# Altium PCB STM32F103C8T6 Blue Pill.PcbDoc
Units mm, origin at the board's own origin, x right, y up, seen from the top; angles counter-clockwise.
Board outline 53.85 x 25.78 mm, 4 copper layers (Top Layer, Layer 1, Layer 2, Bottom Layer), stack 0.55 mm thick; 36 components, 51 nets, 209 pads, 2 vias.
Unrouted connection lines stored in the file: 1.
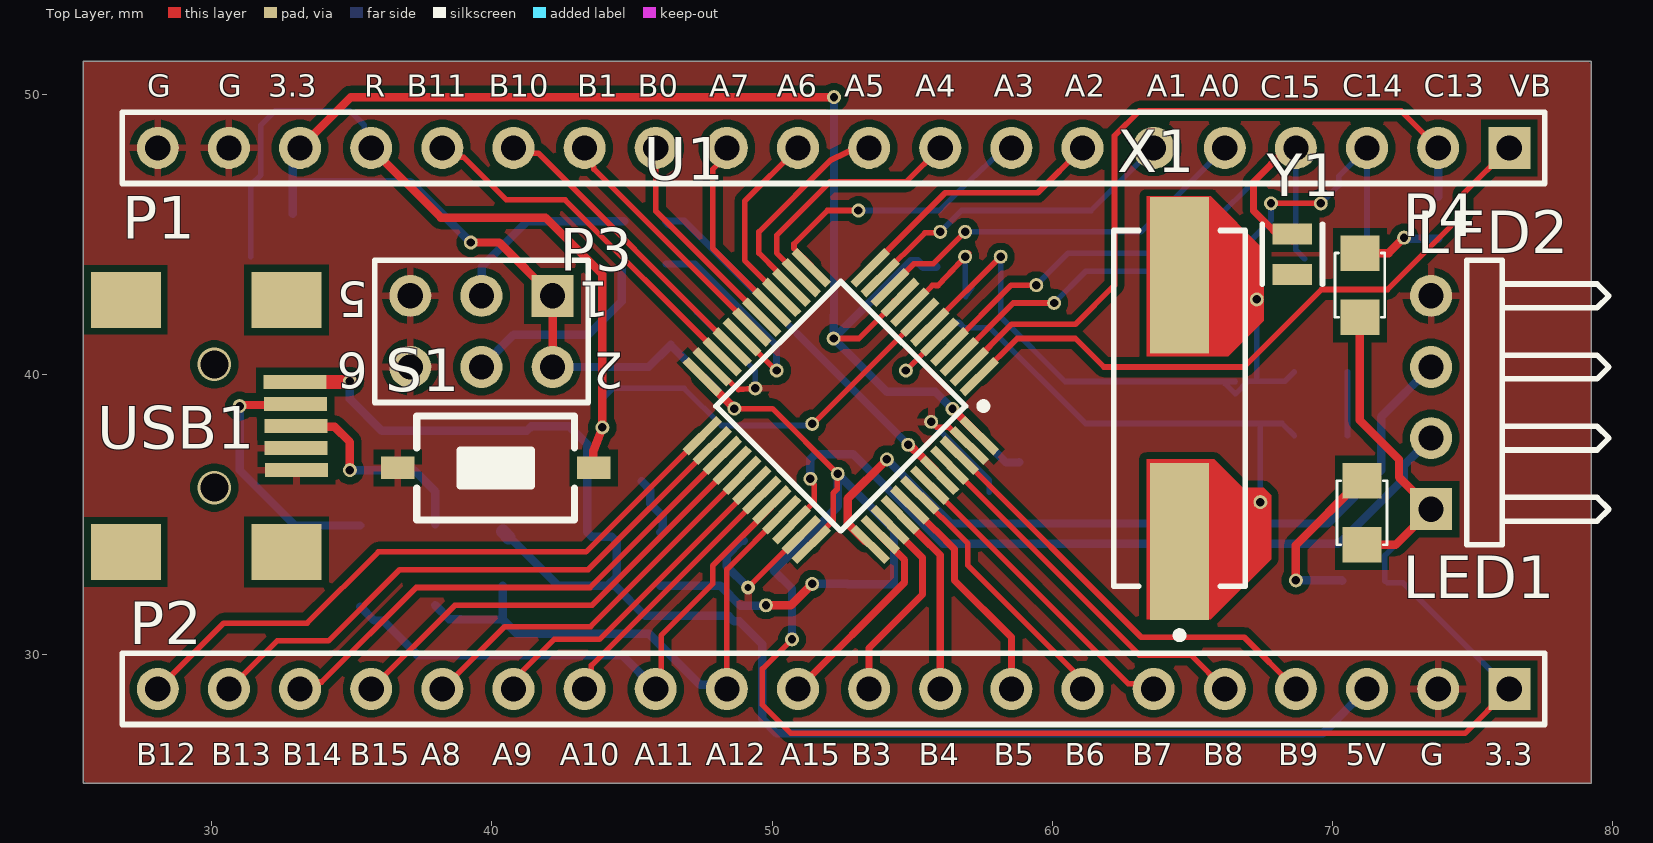
[diagram p0: Top Layer view]
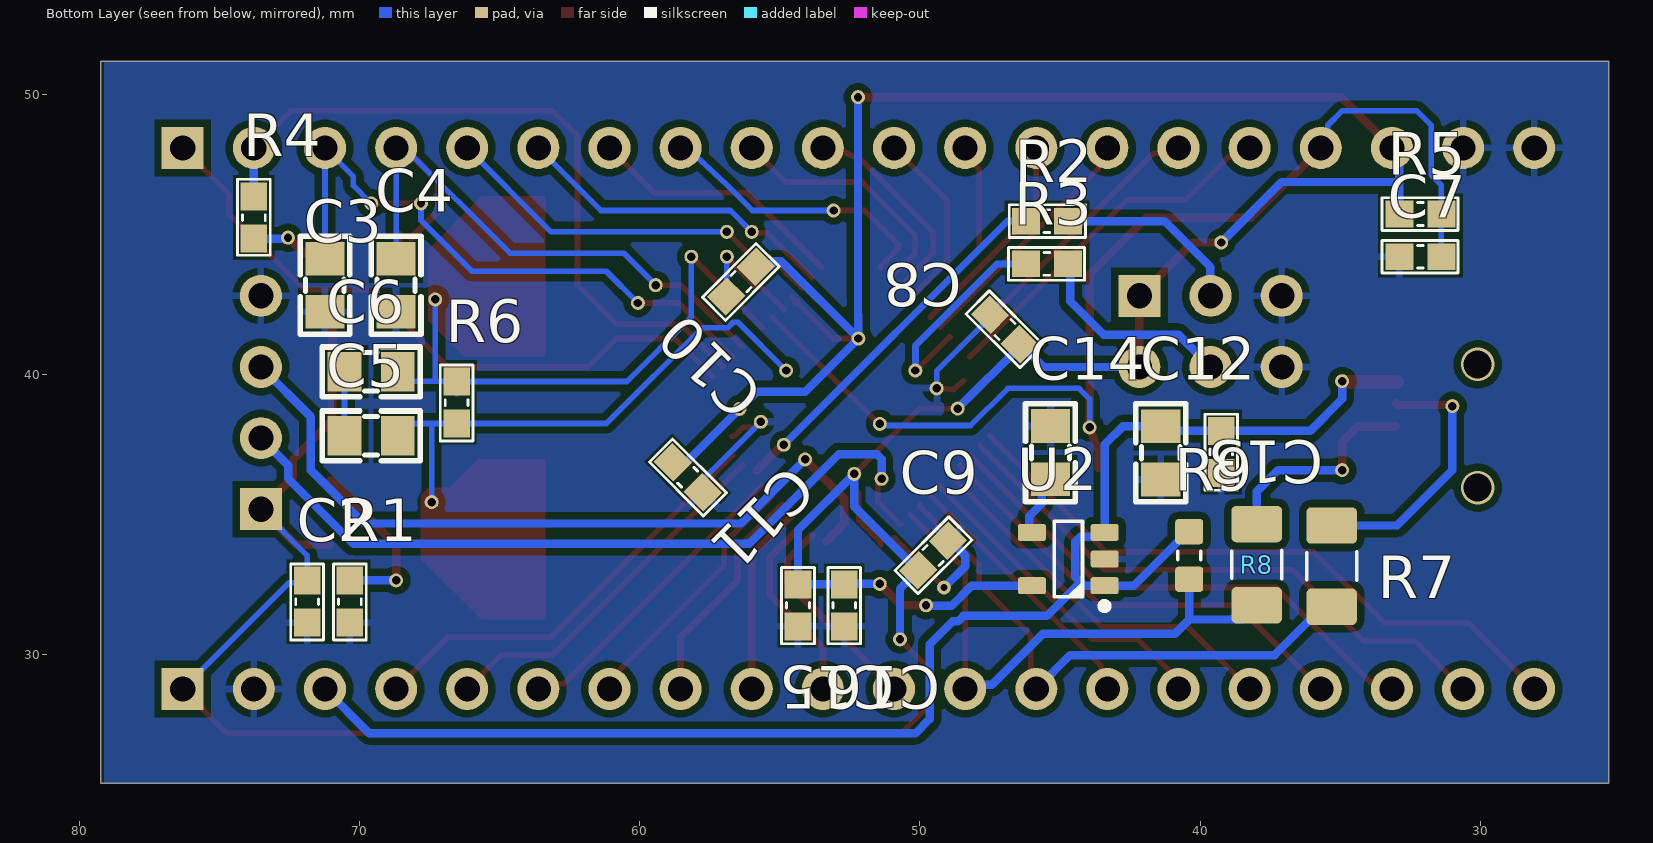
[diagram p1: Bottom Layer view, seen from below]
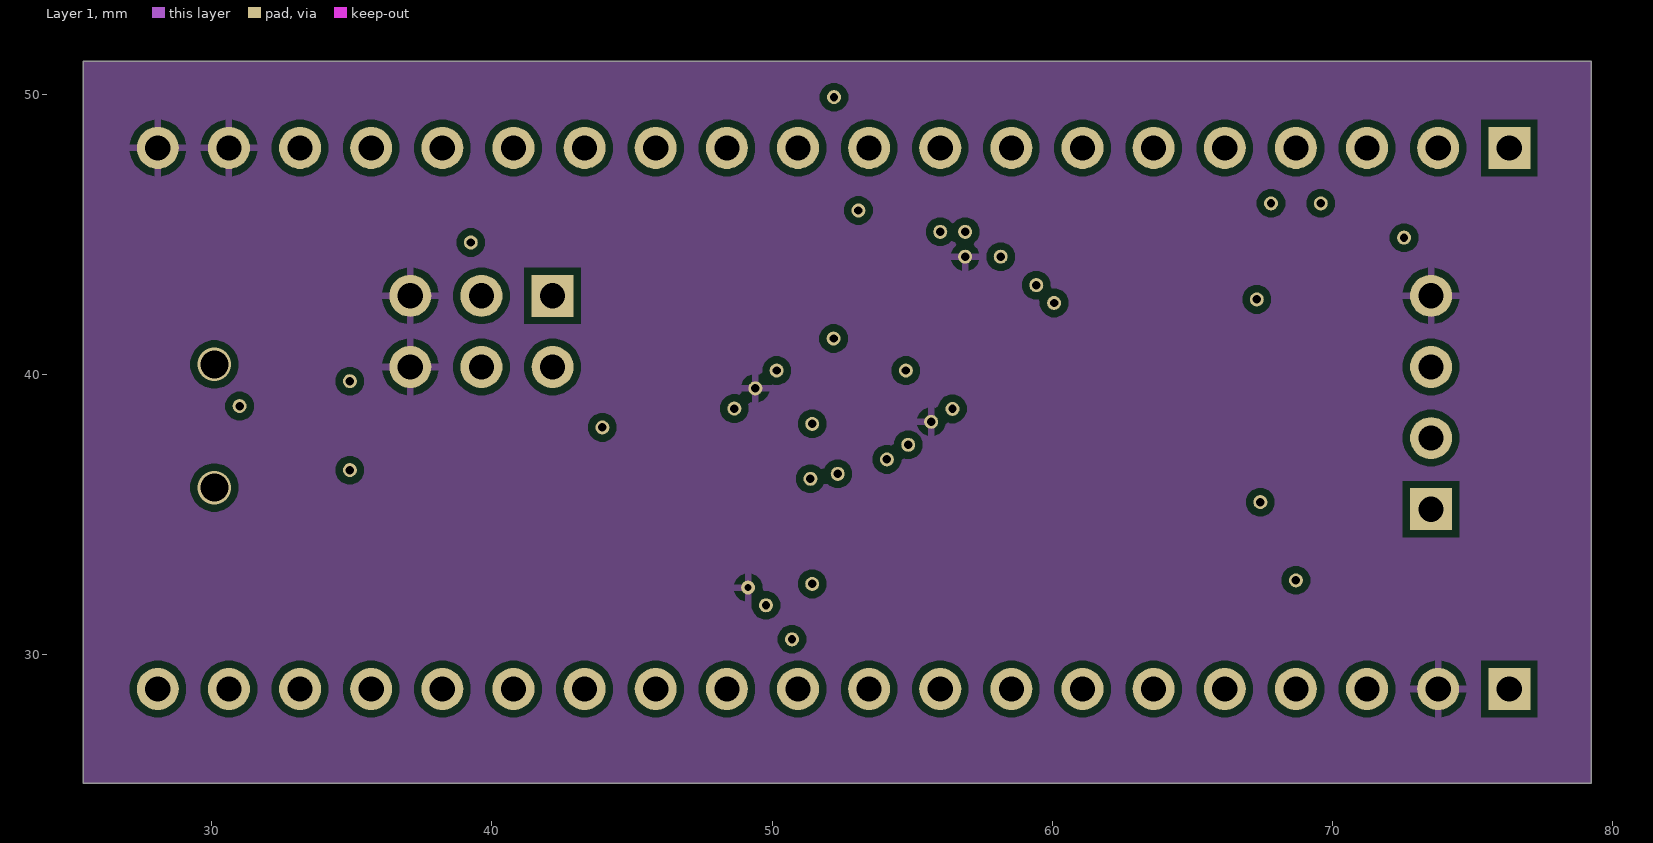
[diagram p2: Layer 1]
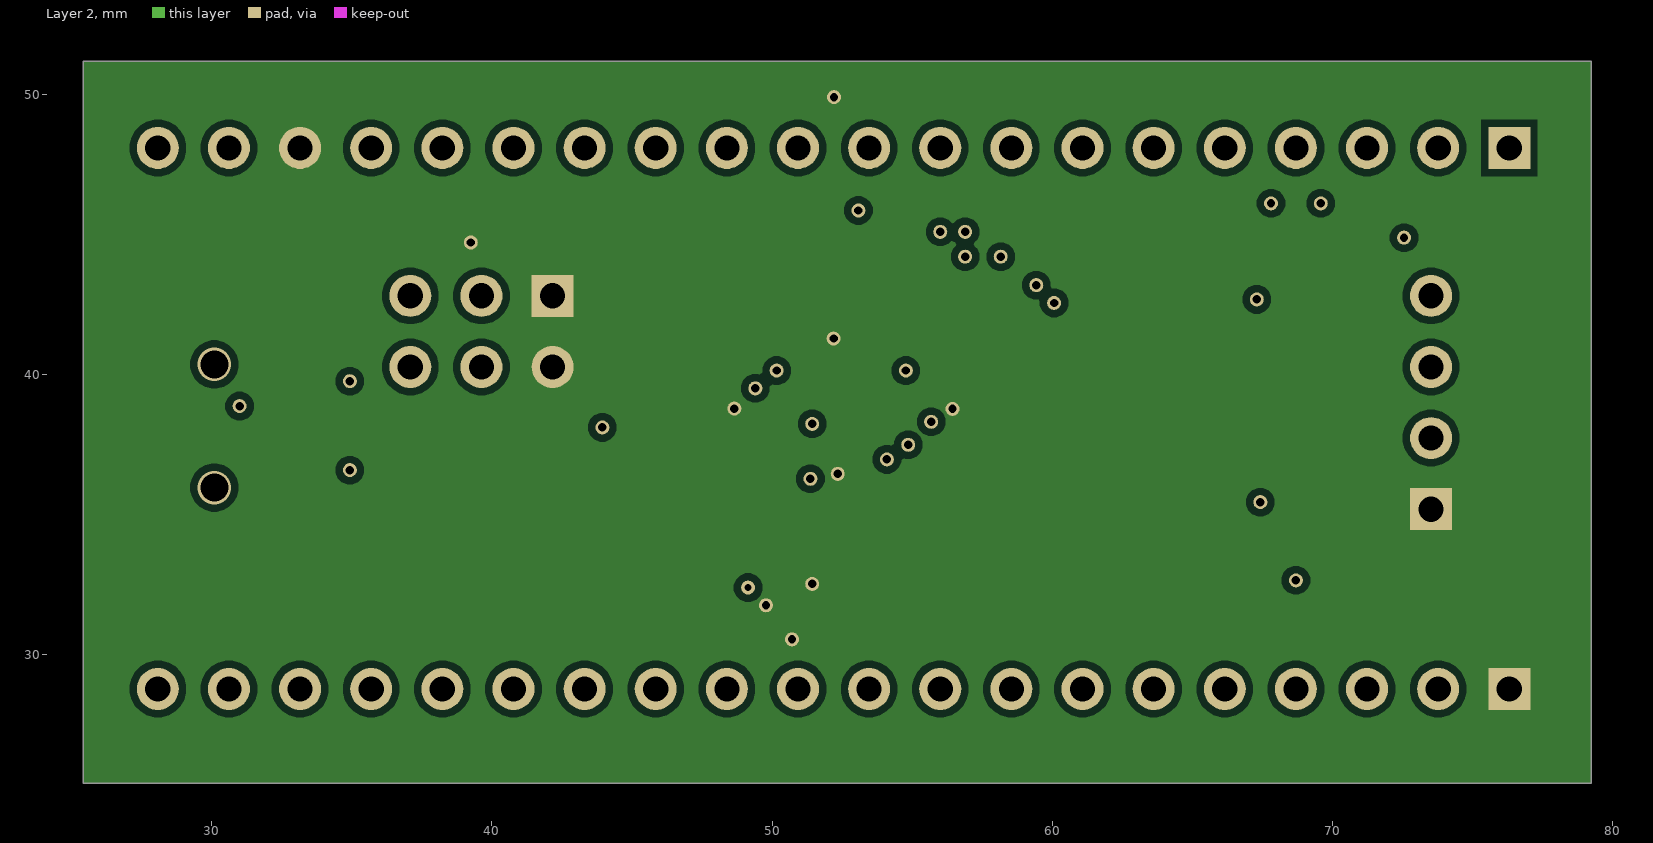
[diagram p3: Layer 2]

## Layer stack, top to bottom
Top Solder: solder mask 0.0102, Solder Resist, Dk 3.5
Top Layer: signal copper 0.009
Dielectric 2: prepreg 0.0711, PP-006, Dk 4.1
Layer 1: signal copper 0.035
Dielectric 1: dielectric 0.32, FR-4, Dk 4.8
Layer 2: signal copper 0.035
Dielectric 3: prepreg 0.0711, PP-006, Dk 4.1
Bottom Layer: signal copper 0.009
Bottom Solder: solder mask 0.0102, Solder Resist, Dk 3.5

## Board outline
25.4,25.4 79.248,25.4 79.248,51.181 25.4,51.181

## Design rules (kind name [scope] priority, off if disabled: settings)
Clearance [InComponent('U1')] p1: gap=0.15 ignorepadtopadclearanceinfootprint=FALSE
Clearance Clearance_1 [All] p2: gap=0.254 ignorepadtopadclearanceinfootprint=FALSE
PlaneConnect [All] p1: planeconnectstyle=Direct reliefexpansion=0.508 reliefentries=4 reliefconductorwidth=0.254 reliefairgap=0.254
PolygonConnect [All] p1: connectstyle=Direct reliefconductorwidth=0.254 reliefentries=4 polygonreliefangle="90 Angle" airgapwidth=0.254
RoutingVias [All] p1: holewidth=0.711 width=1.27 viastyle="Through Hole" minholewidth=0.711 minwidth=1.27 maxholewidth=0.711 maxwidth=1.27
SolderMaskExpansion [All] p1: expansion=0.102 istentingtop=FALSE
Width Width_1 [All] p1: maxlimit=0.5 minlimit=0.2 preferedwidth=0.3
29 further rules are at their usual default settings.

## Components (designator, comment, footprint, x,y, rotation, side; value= is the part's Value field where it differs from the comment)
C2 "104" "tu 0603" 71.882,31.877 r270 bottom
C3 "20pF" "tu 0805" 71.247,43.18 r270 bottom
C4 "20pF" "tu 0805" 68.707,43.18 r270 bottom
C5 "20pF" "tu 0805" 69.596,37.798 r0 bottom
C6 "20pF" "tu 0805" 69.596,40.084 r0 bottom
C7 "105" "tu 0603" 32.131,44.196 r0 bottom
C8 "104" "tu 0603" 46.968,41.598 r45 bottom
C9 "104" "tu 0603" 49.53,33.528 r135 bottom
C10 "104" "tu 0603" 56.388,43.307 r315 bottom
C11 "104" "tu 0603" 58.293,36.322 r225 bottom
C12 "105" "tu 0805" 41.402,37.197 r270 bottom
C13 "104" "tu 0603" 39.243,37.227 r270 bottom
C14 "22nF" "tu 0805" 45.342,37.197 r90 bottom
C15 "106" "tu 0603" 54.356,31.75 r270 bottom
C16 "104" "tu 0603" 52.705,31.75 r270 bottom
LED1 "LED SMD" SM-LED-0805-Blue 71.069,33.909 r90 top
LED2 "LED SMD" SM-LED-0805-Blue 70.993,42.037 r90 top
P1 "Header 20" HDR1X20 76.327,48.081 r180 top
P2 "Header 20" HDR1X20 76.327,28.761 r180 top
P3 "Header 3X2" HDR2X3 42.164,42.799 r180 top
P4 "Header 4H" HDR1X4H 73.533,35.179 r90 top
R1 "510R" "tro smd 0603" 70.358,31.877 r270 bottom
R2 "100k" "tro smd 0603" 45.466,45.466 r180 bottom
R3 "100k" "tro smd 0603" 45.466,43.942 r0 bottom
R4 "510R" "tro smd 0603" 73.787,45.593 r90 bottom
R5 "10k" "tro smd 0603" 32.131,45.72 r0 bottom
R6 "1M" "tro smd 0603" 66.548,38.989 r270 bottom
R7 "Thick Film" RESC3216N 35.299,33.147 r90 bottom value=20R
R8 "Thick Film" RESC3216N 37.973,33.2 r90 bottom locked value=20R
R9 "Thick Film" RESC1608N 40.386,33.528 r90 bottom value=4K7
S1 "SW-SMD" SW-SMD 40.132,36.654 r0 top
U1 "STM32F103C8T6" LQFP-48_19.6_393_58X11_SMD 52.455,38.862 r225 top
U2 "RT9193-33GB" SOT23-5 44.704,33.401 r0 bottom
USB1 "USB_M" USB_B_MINI_SMD 32.969,39.726 r90 top
X1 "8MHZ" ABRA-ABLS-14.7456MHZ-B2-T_V 64.549,38.782 r90 top
Y1 "ABS06-32.768KHZ-6-T" FP-ABS06-MFG 68.58,44.286 r90 top

## Footprints (in the part's own frame and the unit in brackets; to place one, negate y for a bottom-side part, rotate by r counter-clockwise, add the part's x,y. Pads: shape width x height; smd on the part's side, far side on the other; paste and mask are expansions set on the pad)
ABRA-ABLS-14.7456MHZ-B2-T_V [mm] "SMD, 2-Leads, Body 11.4x4.7mm"
  rect 5.6x2.1 smd: 1(-4.75,0) 2(4.75,0)
  silkscreen extent -8.22,-2.35 6.35,2.35, body extent -6.35,-2.35 6.35,2.35, height 4.16
FP-ABS06-MFG [mm]
  rect 0.75x1.4 smd paste+0 mask+0: 1(-0.725,0) 2(0.725,0)
  silkscreen extent -1.07,-1.07 1.07,1.07, body extent -1.2,-0.8 1.2,0.8, height 0.25
HDR1X4H [mm] "Connector; Header; 4 Position; Right Angle"
  rect 1.5x1.5 hole 0.9: 1(0,0)
  round 1.5 hole 0.9: 2(2.54,0) 3(5.08,0) 4(7.62,0)
  silkscreen extent -1.27,-6.35 8.89,-1.27, body extent -1.27,-7 8.89,1.27, height 4.33
HDR1X20 [mm] "Connector; Header; 20 Position"
  rect 1.5x1.5 hole 0.9: 1(0,0)
  round 1.5 hole 0.9: 2(2.54,0) 3(5.08,0) 4(7.62,0) 5(10.16,0) 6(12.7,0) 7(15.24,0) 8(17.78,0) 9(20.32,0) 10(22.86,0) 11(25.4,0) 12(27.94,0) 13(30.48,0) 14(33.02,0) 15(35.56,0) 16(38.1,0) 17(40.64,0) 18(43.18,0) 19(45.72,0) 20(48.26,0)
  silkscreen extent -1.27,-1.27 49.53,1.27
HDR2X3 [mm] "Connector; Header; 3x2 Position"
  rect 1.5x1.5 hole 0.9: 1(0,0)
  round 1.5 hole 0.9: 2(0,2.54) 3(2.54,0) 4(2.54,2.54) 5(5.08,0) 6(5.08,2.54)
  silkscreen extent -1.27,-1.27 6.35,3.81, body extent -1.27,-1.27 6.35,3.81, height 7
LQFP-48_19.6_393_58X11_SMD [mm] "48LQFP"
  rect 1.7x0.3 smd mask+0.076: 1(-4.238,2.75) 2(-4.238,2.25) 3(-4.238,1.75) 4(-4.238,1.25) 5(-4.238,0.75) 6(-4.238,0.25) 7(-4.238,-0.25) 8(-4.238,-0.75) 9(-4.238,-1.25) 10(-4.238,-1.75) 11(-4.238,-2.25) 12(-4.238,-2.75) 25(4.238,-2.75) 26(4.238,-2.25) 27(4.238,-1.75) 28(4.238,-1.25) 29(4.238,-0.75) 30(4.238,-0.25) 31(4.238,0.25) 32(4.238,0.75) 33(4.238,1.25) 34(4.238,1.75) 35(4.238,2.25) 36(4.238,2.75)
  rect 0.3x1.7 smd mask+0.076: 13(-2.75,-4.238) 14(-2.25,-4.238) 15(-1.75,-4.238) 16(-1.25,-4.238) 17(-0.75,-4.238) 18(-0.25,-4.238) 19(0.25,-4.238) 20(0.75,-4.238) 21(1.25,-4.238) 22(1.75,-4.238) 23(2.25,-4.238) 24(2.75,-4.238) 37(2.75,4.238) 38(2.25,4.238) 39(1.75,4.238) 40(1.25,4.238) 41(0.75,4.238) 42(0.25,4.238) 43(-0.25,4.238) 44(-0.75,4.238) 45(-1.25,4.238) 46(-1.75,4.238) 47(-2.25,4.238) 48(-2.75,4.238)
  silkscreen extent -3.72,-3.15 3.15,3.72, body extent -4.5,-4.5 4.5,4.5, height 1.7
RESC1608N [mm] "Chip Resistor, Body 1.6x0.8mm, 0603, IPC Medium Density"
  round 0.254 on Mech14: 0(0,0)
  rrect25% 0.9x1 smd: 1(-0.85,0) 2(0.85,0)
  Top Layer pour cut-out: -0.4,0.6 0.4,0.6 0.4,-0.6 -0.4,-0.6
  silkscreen extent -0.15,-0.41 0.15,0.41, body extent -0.87,-0.47 0.88,0.48, height 0.54
RESC3216N [mm] "Chip Resistor, Body 3.2x1.6mm, 1206, IPC Medium Density"
  round 0.508 on Mech14: 0(0,0)
  rrect25% 1.3x1.8 smd: 1(-1.45,0) 2(1.45,0)
  silkscreen extent -0.51,-0.89 0.51,0.89, body extent -1.62,-0.82 1.63,0.83, height 0.69
SM-LED-0805-Blue [mil]
  rect 50x55 smd: 1(0,0) 2(90,0)
  silkscreen extent 0,-35 90,35, body extent 5,-25 85,25, height 43
SOT23-5 [mm]
  round 0.5 on Mech14: 0(0,0)
  rrect25% 1x0.6 smd: 1(-1.3,0.95) 2(-1.3,0) 3(-1.3,-0.95) 4(1.3,-0.95) 5(1.3,0.95)
  silkscreen extent -1.42,-1.35 0.51,1.81, body extent -1.4,-1.45 1.4,1.45, height 1.44
SW-SMD [mm] "Switch SMD type"
  rect 1.2x0.8 smd: 1(-3.5,0) 2(3.5,0)
  silkscreen extent -2.82,-1.85 2.82,1.85, body extent -3.05,-1.85 3.05,1.85, height 2.5
"tro smd 0603" [mm] "Chip Capacitor, 2-Leads, Body 1,60x0,80mm, IPC Medium Density"
  rect 1x0.95 smd mask+0.076: 1(-0.75,0) 2(0.75,0)
  silkscreen extent -1.35,-0.58 1.37,0.58, body extent -0.82,-0.42 0.82,0.43, height 0.44
"tu 0603" [mm] "Chip Capacitor, 2-Leads, Body 1,60x0,80mm, IPC Medium Density"
  rect 1x0.95 smd mask+0.076: 1(-0.75,0) 2(0.75,0)
  silkscreen extent -1.35,-0.58 1.37,0.58, body extent -0.8,-0.4 0.8,0.4, height 0.9
"tu 0805" [mm] "Compoment SMD 80x50mil"
  rect 1.2x1.4 smd: 1(-0.946,-0.003) 2(0.954,-0.003)
  silkscreen extent -1.75,-0.89 1.75,0.89, body extent -1.01,-0.64 1.01,0.63, height 0.61
USB_B_MINI_SMD [mm]
  rect 2x2.5 smd: 0(-6.075,0.305) 0(-6.071,6.045) 0(2.925,0.305) 0(2.929,6.045)
  rect 0.5x2.25 smd: 1(0,0) 2(-0.787,-0.013) 3(-1.575,-0.025) 4(-2.362,-0.038) 5(-3.15,-0.051)
  body extent -6.92,-0.37 3.78,8.83, height 3.95

## Part data
C2 C8 C9 C10 C11 C13 C16: library part "Tu 0603 104 50V 10%", "Dán", Chung_Loai=Dán, Don_Vi=Con, Ma_Hang=MH004568, So_Chan=2, Ten_Linh_Kien="Tụ 0603 104-100nF 10% 50V"
C3 C4 C5 C6: library part "Tu 0805 20pF 50V 10%", "Dán", Chung_Loai=Dán, Don_Vi=Con, Ma_Hang=MH004558, So_Chan=2, Ten_Linh_Kien="Tụ 0805 20P 10% 50V"
C7: library part "Tu 0603 105 16V 20%", "Dán", Chung_Loai=Dán, Don_Vi=Con, Ma_Hang=MH004574, So_Chan=2, Ten_Linh_Kien="Tụ 0603 105-1uF 20% 16V"
C12: library part "Tu 0805 105 50V 10%", "Dán", Chung_Loai=Dán, Don_Vi=Con, Ma_Hang=MH004552, So_Chan=2, Ten_Linh_Kien="Tụ 0805 105-1uF 10% 50V"
C14: library part "Tu 0805 22nF 50V 20%", "Dán", Chung_Loai=Dán, Don_Vi=Con, Ma_Hang=MH007857, So_Chan=2, Ten_Linh_Kien="Tụ 0805 22nF 50V 20%"
C15: library part "Tu 0603 106 16V 20%", "Dán", Chung_Loai=Dán, Don_Vi=Con, Ma_Hang=MH004848, So_Chan=2, Ten_Linh_Kien="Tụ 0603-10uF 20% 16V"
LED1 LED2: library part LED-SMD-0805
P1 P2: "Header, 20-Pin", LatestRevisionDate=17-Jul-2002, LatestRevisionNote="Re-released for DXP Platform.", Publisher="Altium Limited"
P3: "Header, 3-Pin, Dual row", LatestRevisionDate=17-Jul-2002, LatestRevisionNote="Re-released for DXP Platform.", Publisher="Altium Limited"
P4: "Header, 4-Pin, Right Angle", LatestRevisionDate=17-Jul-2002, LatestRevisionNote="Re-released for DXP Platform.", Publisher="Altium Limited"
R1 R4: library part "Tro 0603 5% 510R", "Dán", Chung_Loai=Dán, Don_Vi=Con, Ma_Hang=MH007667, So_Chan=2, Ten_Linh_Kien="Trở 0603 5% 510R"
R2 R3: library part "Tro 0603 5% 100k", "Dán", Chung_Loai=Dán, Don_Vi=Con, Ma_Hang=MH006314, So_Chan=2, Ten_Linh_Kien="Trở 0603 5% 100k"
R5: library part "Tro 0603 1% 10k", "Dán", Chung_Loai=Dán, Don_Vi=Con, Ma_Hang=MH006333, So_Chan=2, Ten_Linh_Kien="Trở 0603 1% 10k"
R6: library part "Tro 0603 5% 1M", "Dán", Chung_Loai=Dán, Don_Vi=Con, Ma_Hang=MH006909, So_Chan=2, Ten_Linh_Kien="Trở 0603 5% 1M"
R7 R8: library part RES_20R_1206_5%, "Resistor SMD chip 20 Ohm 0.25W 5% 1206", Manufacturer 1=Yageo, Manufacturer Part Number 1=RC1206JR-0720RL, Package / Case="1206 (3216 metric)", Ratings=1/4W, Supplier Part Number 1=311-20ERCT-ND, Tolerance=±5%, Supplier 1=Digi-Key
R9: library part RES_4K7_0603_5%, "Resistor SMD chip 4.7k Ohm 0.1W 5% 0603", Manufacturer 1=Vishay/Dale, Manufacturer Part Number 1=CRCW06034K70JNEA, Package / Case="0603 (1608 metric)", Ratings="1/10 W", Supplier Part Number 1=541-4.7KGCT-ND, Tolerance=±5%, Material="Thick Film", Supplier 1=Digi-Key
S1: "Switch", LatestRevisionDate=17-Jul-2002, LatestRevisionNote="Re-released for DXP Platform.", PackageReference=SPST-2, Published=24-Mar-1999, Publisher="Altium Limited"
U1: library part IC_STM32F103C8T6, "ARM® Cortex®-M3 STM32F1 Microcontroller IC 32-Bit 72MHz 64KB (64K x 8) FLASH 48-LQFP (7x7)", Alternate Part Number-1=NA, Case/Package=LQFP48, Manufacturer=STMicroelectronics, Manufacturer Part Number=STM32F103C8T6, Supplier Part Number-1=STM32F103C8T6, Supplier-1=LCSC
U2: library part REG_5.5V-3.3V-0.3A-1W-SOT-23-5, "Linear Voltage Regulator IC 1 Output 300mA SOT-23-5", Alternate Part Number-1=NA, Case/Package=SOT-23-5, Manufacturer="Richtek USA Inc.", Supplier Part Number-1=C15651, Manufacturer Part Number=RT9193-33GB, Supplier-1=LCSC
X1: library part CMP-2000-05726-1, "Low Profile Crystal, 8.0 MHz, +/- 30 ppm, -20 to 70 degC, 2-Pin SMD, RoHS, Tape and Reel", Case Height=4.2mm, Case Length=11.4mm, Case Width=4.7mm, Frequency=8MHz, Frequency Stability=50PPM, Load Capacitance=18pF, Manufacturer=ABRACON, Operating Temperature Range=-20Cto+70C, Package / Case=HC-49/US, Package Description="2-Pin Surface Mount Device, Body 11.4 x 4.7 mm", Package Reference=ABLS-14.7456MHZ-B2-T, Tolerance=30PPM, Brand=ABRACON, Datasheet URL=http://www.abracon.com/Resonators/abls.pdf, Datasheet Version=04/2011, Dimensions=4.7mmWx11.4mmLx4.2mmH, ESR=80Ohms, Factory Pack Quantity=1000, Manufacturer URL=http://www.abracon.com/, Mounting Style=SMD/SMT, Mounting Technology=SurfaceMount, Package URL=http://www.abracon.com/Support/PackageDrawing/Resonators/ABLS-2D.pdf, Packaging=Reel, Product Category=Crystals, RoHS=Details, Series=ABLS, Termination Style=SMD/SMT, Type=LowProfileMicroprocessorCrystal
Y1: library part CMP-27762-015510-1, "Crystal 32.768kHz ±20ppm (Tol) 6pF FUND 90kΩ 2-Pin Mini-CSMD T/R", Case/Package=SMD/SMT, ESR (Equivalent Series Resistance)=90kR, Frequency=32.768kHz, Frequency Tolerance=20ppm, Load Capacitance=6pF, Max Operating Temperature=85°C, Min Operating Temperature=-40°C, Height=0.024inch, Length=0.079inch, Mount="Surface Mount", Number of Pins=2, Packaging="Tape and Reel", Radiation Hardening=No, RoHS Compliant=Yes, Series=ABS06, Series Resistance=90kR, Width=0.047inch

## Free pads (board coordinates)
  round 0.5 hole 0.3: 4(30.988,38.862) 4(34.925,36.576) 4(34.925,39.751) 4(39.243,44.704) 4(43.942,38.1) 4(48.655,38.773) 4(49.403,39.497) 4(49.784,31.75) 4(50.165,40.132) 4(50.713,30.533) 4(51.371,36.266) 4(51.435,32.512) 4(51.435,38.227) 4(52.197,41.275) 4(52.213,49.895) 4(52.347,36.443) 4(53.086,45.847) 4(54.102,36.957) 4(54.78,40.132) 4(54.864,37.481) 4(55.683,38.301) 4(56.007,45.085) 4(56.444,38.762) 4(56.896,44.196) 4(56.896,45.085) 4(58.166,44.196) 4(59.436,43.18) 4(60.071,42.545) 4(67.31,42.672) 4(67.437,35.433) 4(67.818,46.101) 4(68.707,32.639) 4(69.596,46.101) 4(72.568,44.876)
  round 0.5 hole 0.25: 4(49.145,32.381)

## Via types
v1: diameter 1.2, hole 1, Top Layer to Bottom Layer, 2 vias

## Nets (pads, with @x,y where several pads share a name; then routed paths per layer and width w, separated by ;. In a path a pad name is that pad's centre, name@x,y a point inside that pad or via, vN(x,y) a via of type N, cw(c..) or ccw(c..) an arc to the next point about the centre after c; other vN are vias at no path point)
5V: C12.1 C13.1 P2.3 pad.4@34.925,39.751 R9.2 U2.1 U2.3 USB1.1 | length 54.3
  Top Layer w0.254: P2.3@71.12,28.575 71.247,28.702 P2.3
  Top Layer w0.5: USB1.1 34.9,39.726 pad.4@34.925,39.751
  Bottom Layer w0.3: pad.4@34.925,39.751 34.925,39.116 36.064,37.977 41.24,37.977 C12.1 42.756,38.143 43.404,37.495 U2.3 43.554,34.201 44.274,34.201 44.45,34.025 44.45,32.766 44.135,32.451 ; R9.2 R9.2@40.436,34.378 ; R9.2@40.611,34.203 42.363,32.451 U2.1 44.135,32.451 ; P2.3 69.664,27.178 50.165,27.178 49.657,27.686 49.657,30.353 48.837,31.173 48.645,31.173 48.449,31.369 45.466,31.369 44.384,32.451 44.135,32.451
  Bottom Layer w0.5: R9.2 R9.2@40.586,34.178
BOOT0: pad.4@54.864,37.481 R2.1 U1.44 | length 13.5
  Top Layer w0.3: pad.4@54.864,37.481 54.918,37.465 55.299,37.084 55.313,37.084 U1.44@55.83,36.568
  Bottom Layer w0.25: R2.1 46.879,45.466 pad.4@54.864,37.481
  Bottom Layer w0.3: R2.1 R2.1@46.328,45.354
BOOT1: pad.4@50.165,40.132 R3.2 U1.20 | length 7.8
  Top Layer w0.2: U1.20 48.948,41.328 50.145,40.132 pad.4@50.165,40.132
  Bottom Layer w0.25: R3.2 47.244,43.942 50.165,41.021 pad.4@50.165,40.132
GND: C2.2 C3.2 C4.2 C7.2 C8.2 C9.2 C10.2 C11.2 C12.2 C13.2 C14.2 C15.2 C16.2 P1.19 P1.20 P2.2 P3.5 P3.6 P4.4 pad.4@49.145,32.381 pad.4@49.403,39.497 pad.4@55.683,38.301 pad.4@56.896,44.196 R1.2 S1.1 U1.8 U1.23 U1.35 U1.47 U2.2 USB1.4 USB1.5 | length 18.8
  Top Layer w0.2: U1.23@48.433,39.773 cw(c43.132,33.44) 48.531,39.689 48.804,39.453 pad.4@49.403,39.497 ; pad.4@49.145,32.28 49.145,32.381 U1.35@50.927,34.163 ; U1.8@54.862,42.309 55.725,43.173 55.819,43.173 55.847,43.17 55.928,43.17 pad.4@57.023,44.323 ; pad.4@55.683,38.301 55.885,38.1 56.328,38.1 56.646,37.782 U1.47@56.711,37.782
  Bottom Layer w0.2: C8.2@47.301,42.221 49.403,40.118 pad.4@49.403,39.497 ; pad.4@55.683,38.301 57.763,36.222 C11.2 ; pad.4@56.901,43.987 56.901,43.78 56.901,43.325 56.901,42.794 C10.2 C10.2@57.134,43.092
  Bottom Layer w0.3: C9.2 48.917,34.058 48.384,33.525 48.384,33.142 pad.4@49.145,32.381
NetC5_2: C5.2 C6.2 | length 2.3
  Bottom Layer w0.2: C5.2 C6.2
NetC14_1: C14.1 U2.4 | length 2.2
  Bottom Layer w0.3: C14.1@45.339,36.185 45.649,35.875 45.649,35.377 46.101,34.925 46.101,34.448 U2.4
NetLED1_2: LED1.2 pad.4@68.707,32.639 R1.1 | length 6.2
  Top Layer w0.3: pad.4@68.707,32.639 68.707,33.897 71.005,36.195 LED1.2
  Bottom Layer w0.3: pad.4@68.707,32.639 70.346,32.639 R1.1
NetLED2_2: LED2.2 pad.4@72.568,44.876 R4.1 | length 3
  Top Layer w0.3: LED2.2 72.015,44.323 pad.4@72.568,44.876
  Bottom Layer w0.3: pad.4@72.644,44.831 73.775,44.831 R4.1
NetP3_3: P3.3 R2.2 | length 6.8
  Bottom Layer w0.3: P3.3 39.632,42.807 39.632,43.823 41.275,45.466 R2.2
NetP3_4: P3.4 R3.1 | length 7.3
  Bottom Layer w0.3: P3.4 40.778,41.413 43.445,41.413 44.629,42.597 R3.1@44.629,43.88
NetR7_2: pad.4@30.988,38.862 R7.2 USB1.2 | length 9.5
  Top Layer w0.3: pad.4@30.988,38.862 31.026,38.9 32.944,38.9 USB1.2 USB1.2@33.007,38.964
  Bottom Layer w0.3: pad.4@30.988,38.862 30.988,36.576 32.967,34.597 R7.2
NetR8_2: pad.4@34.925,36.576 R8.2 USB1.3 | length 7.7
  Top Layer w0.3: USB1.3 33.022,38.124 34.379,38.124 34.925,37.578 pad.4@34.925,36.576
  Bottom Layer w0.3: pad.4@34.925,36.576 37.211,36.576 37.973,35.814 R8.2
OSCIN: C5.1 pad.4@54.78,40.132 pad.4@67.437,35.433 R6.2 U1.5 X1.1 | length 20.8
  Top Layer w0.2: pad.4@54.78,40.132 54.786,40.132 U1.5
  Bottom Layer w0.2: pad.4@54.78,40.132 56.502,41.855 56.668,41.855 56.867,41.656 57.785,41.656 61.202,38.239 R6.2 67.38,38.239 ; pad.4@67.437,35.433 67.437,38.182 67.38,38.239 ; C5.1 68.213,38.239 67.38,38.239
OSCOUT: C6.1 pad.4@58.166,44.196 pad.4@67.31,42.672 R6.1 U1.6 X1.2 | length 20.9
  Top Layer w0.2: U1.6 55.64,41.682 58.154,44.196 pad.4@58.166,44.196
  Bottom Layer w0.2: pad.4@58.166,44.196 58.166,42.037 60.464,39.739 R6.1 ; R6.1@66.175,39.671 66.548,39.298 67.001,39.751 67.31,39.751 ; pad.4@67.31,42.672 67.31,39.751 ; C6.1 68.314,39.751 67.31,39.751
PA0: P1.5 pad.4@56.896,45.085 U1.10 | length 14.9
  Top Layer w0.2: U1.10@54.774,43.597 U1.10 55.06,43.942 55.753,43.942 pad.4@56.896,45.085 ; P1.5@66.096,48.01 P1.5
  Bottom Layer w0.2: pad.4@56.896,45.085 63.171,45.085 P1.5
PA1: P1.6 pad.4@56.007,45.085 U1.11 | length 11.9
  Top Layer w0.2: U1.11 55.457,45.046 55.968,45.046 pad.4@56.007,45.085 ; P1.6@63.508,47.962 P1.6
  Bottom Layer w0.2: pad.4@56.007,45.085 56.769,45.847 61.393,45.847 P1.6
PA2: P1.7 U1.12 | length 9.4
  Top Layer w0.2: U1.12 56.186,46.482 59.488,46.482 P1.7
PA3: P1.8 pad.4@53.086,45.847 U1.13 | length 10.4
  Top Layer w0.2: U1.13 51.403,43.874 50.786,44.491 50.786,44.656 51.977,45.847 pad.4@53.086,45.847 ; P1.8@58.428,47.962 P1.8
  Bottom Layer w0.2: pad.4@53.086,45.847 55.98,45.847 56.869,46.736 58.315,48.086 58.397,48.086 P1.8
PA4: P1.9 U1.14 | length 9
  Top Layer w0.2: U1.14 50.165,44.334 50.165,44.958 52.07,46.863 54.789,46.863 P1.9
PA5: P1.10 U1.15 | length 7.6
  Top Layer w0.2: U1.15 50.198,43.659 49.53,44.327 49.53,45.085 52.087,47.642 53.16,48.16 53.24,48.16 P1.10
PA6: P1.11 U1.16 | length 6.7
  Top Layer w0.2: U1.16 49.022,44.063 49.022,46.176 P1.11
PA7: P1.12 U1.17 | length 6.8
  Top Layer w0.2: P1.12 48.387,47.822 47.879,47.314 47.879,44.499 U1.17
PA8: P2.16 U1.29 | length 13.9
  Top Layer w0.2: P2.16 40.454,30.988 43.521,30.988 U1.29
PA9: P2.15 U1.30 | length 11.8
  Top Layer w0.2: P2.15 40.767,29.083 42.218,30.534 43.839,30.534 49.282,35.977 U1.30
PA10: P2.14 U1.31 | length 9.5
  Top Layer w0.2: P2.14 43.55,29.003 43.55,29.603 U1.31
PA11: P2.13 R7.1 U1.32 | length 20.1
  Top Layer w0.2: P2.13 46.038,28.952 46.038,30.671 47.879,32.512 47.879,33.16 49.989,35.27 U1.32
  Bottom Layer w0.3: R7.1 35.791,31.205 36.105,31.205 37.338,29.972 44.636,29.972 P2.13
PA12: P2.12 R8.1 R9.1 U1.33 | length 19.9
  Top Layer w0.2: P2.12 48.387,33.026 U1.33
  Bottom Layer w0.3: R8.1 38.465,31.258 38.883,31.258 38.899,31.242 40.386,31.242 ; R9.1@40.386,32.45 40.386,31.242 ; P2.12 48.24,28.907 47.437,28.907 45.61,30.734 40.894,30.734 40.386,31.242
PA15: P2.11 U1.38 | length 7.4
  Top Layer w0.254: P2.11 54.737,32.571 54.737,33.364 U1.38@53.844,34.257
PB0: P1.13 U1.18 | length 7.6
  Top Layer w0.2: P1.13 45.847,45.824 U1.18
PB1: P1.14 U1.19 | length 8.9
  Top Layer w0.2: P1.14 43.556,47.832 43.556,47.48 43.637,47.399 43.637,47.326 U1.19
PB3: P2.10 U1.39 | length 7.1
  Top Layer w0.254: P2.10 53.467,30.226 55.372,32.131 55.372,33.448 U1.39@54.203,34.617
PB4: P2.9 U1.40 | length 6.8
  Top Layer w0.254: U1.40@54.562,34.976 55.629,33.909 55.64,33.909 56.007,33.542 P2.9
PB5: P2.8 U1.41 | length 8.1
  Top Layer w0.254: U1.41 55.84,34.417 55.851,34.417 56.515,33.753 56.515,32.639 58.547,30.607 P2.8
PB6: P2.7 U1.42 | length 9.3
  Top Layer w0.2: U1.42 55.275,35.662 56.039,34.898 56.05,34.898 56.996,33.952 56.996,33.174 61.087,29.083 P2.7
PB7: P2.6 U1.43 | length 11
  Top Layer w0.2: U1.43 62.726,28.945 63.443,28.945 P2.6
PB8: P2.5 U1.45 | length 13.1
  Top Layer w0.2: U1.45 U1.45@56.831,36.254 ; U1.45@56.834,36.257 63.119,29.972 64.956,29.972 P2.5
PB9: P2.4 U1.46 | length 15.5
  Top Layer w0.2: U1.46 63.185,30.607 66.861,30.607 P2.4
PB10: P1.15 U1.21 | length 10.8
  Top Layer w0.2: P1.15 40.959,47.889 41.66,47.889 U1.21
PB11: P1.16 U1.22 | length 13.1
  Top Layer w0.2: P1.16 38.579,48.081 38.905,47.755 38.986,47.755 40.513,46.228 42.614,46.228 U1.22
PB12: P2.20 U1.25 | length 23.2
  Top Layer w0.2: P2.20 30.421,31.115 33.401,31.115 35.941,33.655 43.359,33.655 U1.25
PB13: P2.19 U1.26 | length 20.9
  Top Layer w0.2: P2.19 32.326,30.48 34.163,30.48 36.703,33.02 43.431,33.02 U1.26
PB14: P2.18 U1.27 | length 18.5
  Top Layer w0.2: P2.18 33.396,29.009 33.919,29.009 37.294,32.385 43.503,32.385 U1.27
PB15: P2.17 U1.28 | length 16.2
  Top Layer w0.2: P2.17 38.676,31.75 43.575,31.75 U1.28
PC13: P1.2 R4.2 U1.2 | length 25.9
  Top Layer w0.2: U1.2 58.558,41.783 59.166,41.783 60.833,41.783 62.23,43.18 62.23,48.514 63.119,49.403 72.465,49.403 P1.2
  Bottom Layer w0.3: R4.2 P1.2
PC14: C3.1 P1.3 pad.4@60.071,42.545 pad.4@67.818,46.101 pad.4@69.596,46.101 U1.3 Y1.1 | length 22.8
  Top Layer w0.2: U1.3 58.613,42.545 pad.4@60.071,42.545 ; pad.4@67.818,46.101 pad.4@69.596,46.101
  Bottom Layer w0.2: pad.4@60.071,42.545 61.203,43.677 65.997,43.677 67.818,45.498 pad.4@67.818,46.101 ; pad.4@69.596,46.101 70.231,46.736 70.231,47.065 P1.3 71.247,44.129 C3.1 ; C3.1@70.65,44.648 C3.1@71.162,44.203
PC15: C4.1 P1.4 pad.4@59.436,43.18 U1.4 Y1.2 | length 24.1
  Top Layer w0.2: U1.4 58.541,43.18 pad.4@59.436,43.18
  Top Layer w0.254: Y1.2@68.168,44.866 67.563,45.47 67.557,45.47 67.187,45.84 67.187,46.867 68.401,48.081 P1.4 ; Y1.2@68.58,44.757 Y1.2
  Bottom Layer w0.2: pad.4@59.436,43.18 60.579,44.323 64.643,44.323 68.401,48.081 P1.4 68.707,44.437 C4.1@69.018,44.126
RESET: C7.1 P1.17 pad.4@43.942,38.1 pad.4@51.435,38.227 R5.1 S1.2 U1.7 | length 41.6
  Top Layer w0.2: pad.4@51.435,38.227 51.467,38.227 55.247,42.007 55.247,42.035 U1.7
  Top Layer w0.3: P1.17 38.175,45.593 41.91,45.593 43.942,43.561 43.942,38.1 43.622,37.272 43.622,36.664 S1.2
  Bottom Layer w0.2: C7.1 R5.1 31.381,46.748 31.75,47.117 31.75,48.895 32.258,49.403 34.925,49.403 35.438,48.89 35.438,48.33 P1.17 ; pad.4@43.942,38.1 43.942,39.116 44.323,39.497 46.863,39.497 48.191,38.169 51.296,38.169 51.354,38.227 pad.4@51.435,38.227
SWCLK: P4.3 pad.4@54.102,36.957 U1.37 | length 27.6
  Top Layer w0.3: U1.37@53.34,34.036 52.705,34.671 52.705,35.56 pad.4@54.102,36.957
  Bottom Layer w0.3: pad.4@54.102,36.957 56.388,34.671 69.85,34.671 71.755,36.576 71.755,38.481 P4.3
SWIO: P4.2 pad.4@51.371,36.266 U1.34 | length 28.2
  Top Layer w0.2: U1.34 51.501,35.433 51.501,36.055 51.308,36.248 pad.4@51.371,36.266
  Bottom Layer w0.3: pad.4@51.371,36.266 51.371,36.972 51.547,37.148 52.895,37.148 56.103,33.94 70.222,33.94 72.563,36.28 72.563,36.749 P4.2
VBAT: P1.1 U1.1 | length 23.6
  Top Layer w0.2: U1.1 58.757,41.275 60.833,41.275 61.849,40.259 66.854,40.259 69.621,43.026 71.982,43.026 74.676,45.72 74.676,46.43 P1.1
VCC3V3: C2.1 C8.1 C9.1 C10.1 C11.1 C15.1 C16.1 LED1.1 LED2.1 P1.18 P2.1 P3.1 P3.2 P4.1 pad.4@39.243,44.704 pad.4@48.655,38.773 pad.4@49.784,31.75 pad.4@50.713,30.533 pad.4@51.435,32.512 pad.4@52.197,41.275 pad.4@52.213,49.895 pad.4@52.347,36.443 pad.4@56.444,38.762 R5.2 U1.9 U1.24 U1.36 U1.48 U2.5 | length 150.4
  Top Layer w0.2: pad.4@48.655,38.773 50.017,38.773 52.347,36.443 52.325,36.422 52.325,35.893 52.181,35.749 52.181,34.769 51.403,33.991 U1.36 ; pad.4@50.713,30.533 49.657,29.478 49.657,28.194 50.673,27.178 74.744,27.178 P2.1 ; pad.4@52.197,41.275 53.1,41.275 54.403,42.578 U1.9@54.403,42.592 ; U1.9@54.561,42.743 U1.9
  Top Layer w0.3: P1.18 34.961,49.895 pad.4@52.213,49.895 ; pad.4@39.243,44.704 40.259,44.704 P3.1 P3.2 ; U1.24 48.009,39.419 pad.4@48.655,38.773 ; pad.4@49.784,31.75 50.673,31.75 pad.4@51.435,32.512 ; U1.9@54.403,42.592 U1.9@54.423,42.592 ; pad.4@56.444,38.762 U1.48 ; LED2.1 70.993,38.354 72.39,36.957 72.39,36.322 P4.1 72.263,33.909 LED1.1
  Bottom Layer w0.2: C2.1@71.882,32.614 71.882,33.528 P4.1 ; C2.1@71.882,32.639 71.974,32.548 72.54,32.548 75.677,29.411 P2.1
  Bottom Layer w0.3: R5.2 32.881,46.863 ; P1.18 33.147,47.756 32.881,47.49 32.881,46.863 ; pad.4@39.243,44.704 37.084,46.863 32.881,46.863 ; P3.2 45.593,40.259 C8.1@46.333,40.999 ; U2.5 48.15,32.451 48.874,31.727 49.761,31.727 pad.4@49.784,31.75 ; C8.1@46.381,41.047 pad.4@48.655,38.773 ; pad.4@50.713,30.533 50.713,32.345 C9.1 52.347,35.284 52.347,36.443 54.356,34.434 C15.1 C16.1 52.693,32.512 pad.4@51.435,32.512 ; pad.4@52.213,49.895 52.213,43.037 pad.4@52.197,41.275 ; C10.1 55.398,43.837 55.203,44.032 54.954,44.032 pad.4@52.197,41.275 ; C11.1 58.818,36.847 58.359,36.847 56.444,38.762 55.836,39.37 54.102,39.37 pad.4@52.197,41.275
pads on no net: R7.0 R8.0 R9.0 U2.0 USB1.0
copper on no net:
  other v1: 30.084,35.951 30.084,40.351

## Polygon pours and split planes (outlines as drawn)
GND on Layer 1 "GND_L02_P002" (solid, pour order 2): 25.4,51.181 79.248,51.181 79.248,25.4 25.4,25.4
GND on Bottom Layer "GND_L04_P000" (solid, pour order 0): 25.4,51.181 79.121,51.181 79.121,25.4 25.4,25.4
GND on Top Layer "GND_L01_P001" (solid, pour order 1): 25.4,51.181 79.121,51.181 79.248,51.054 79.248,25.4 25.527,25.4 25.4,25.527
VCC3V3 on Layer 2 "VCC3V3_L03_P003" (solid, pour order 3): 25.4,51.181 79.248,51.181 79.248,25.4 25.4,25.4

## Other copper
Top Layer:
  region net OSCIN: 63.373,36.957 65.786,36.957 66.802,35.941 67.564,35.941 67.818,35.687 67.818,33.401 65.659,31.242 63.373,31.242
  region net OSCOUT: 63.373,46.355 65.659,46.355 67.564,44.45 67.564,41.91 66.294,40.64 63.373,40.64

## Silkscreen, mask and mechanical layers (free items; w line width, h text height)
Top Overlay:
  text "G" at 27.686,49.911 h0.8
  text "G" at 30.226,49.911 h0.8
  text "3.3" at 32.004,49.911 h0.8
  text "R" at 35.433,49.911 h0.8
  text "B11" at 36.957,49.911 h0.8
  text "B10" at 39.878,49.911 h0.8
  text "B1" at 43.053,49.911 h0.8
  text "B0" at 45.212,49.911 h0.8
  text "A7" at 47.752,49.911 h0.8
  text "A6" at 50.165,49.911 h0.8
  text "A5" at 52.578,49.911 h0.8
  text "A4" at 55.118,49.911 h0.8
  text "A3" at 57.912,49.911 h0.8
  text "A2" at 60.452,49.911 h0.8
  text "A1" at 63.373,49.911 h0.8
  text "A0" at 65.278,49.911 h0.8
  text "C14" at 70.358,49.911 h0.8
  text "C13" at 73.279,49.911 h0.8
  text "VB" at 76.327,49.911 h0.8
  text "C15" at 67.437,49.873 h0.8
  text "B12" at 27.305,26.035 h0.8
  text "B13" at 29.972,26.035 h0.8
  text "B14" at 32.512,26.035 h0.8
  text "B15" at 34.925,26.035 h0.8
  text "A8" at 37.465,26.035 h0.8
  text "A9" at 40.005,26.035 h0.8
  text "A10" at 42.418,26.035 h0.8
  text "A11" at 45.085,26.035 h0.8
  text "A12" at 47.625,26.035 h0.8
  text "A15" at 50.292,26.035 h0.8
  text "B3" at 52.832,26.035 h0.8
  text "B4" at 55.245,26.035 h0.8
  text "B5" at 57.912,26.035 h0.8
  text "B6" at 60.452,26.035 h0.8
  text "B7" at 62.865,26.035 h0.8
  text "B8" at 65.405,26.035 h0.8
  text "B9" at 68.072,26.035 h0.8
  text "5V" at 70.485,26.035 h0.8
  text "G" at 73.152,26.035 h0.8
  text "3.3" at 75.438,26.035 h0.8

## Text inside footprints (layer, text, board x,y; h text height)
P3: Top Overlay "6" at 35.56,40.767 h1.27 r180; Top Overlay "5" at 35.56,43.307 h1.27 r180; Top Overlay "2" at 44.704,40.767 h1.27 r180; Top Overlay "1" at 44.196,43.307 h1.27 r180